# Altium PCB PCB REGULATOR.PcbDoc
Units mm, origin at the board's own origin, x right, y up, seen from the top; angles counter-clockwise.
Board outline 29 x 11 mm, 2 copper layers (Top Layer, Bottom Layer); 5 components, 3 nets, 17 pads, 5 vias.
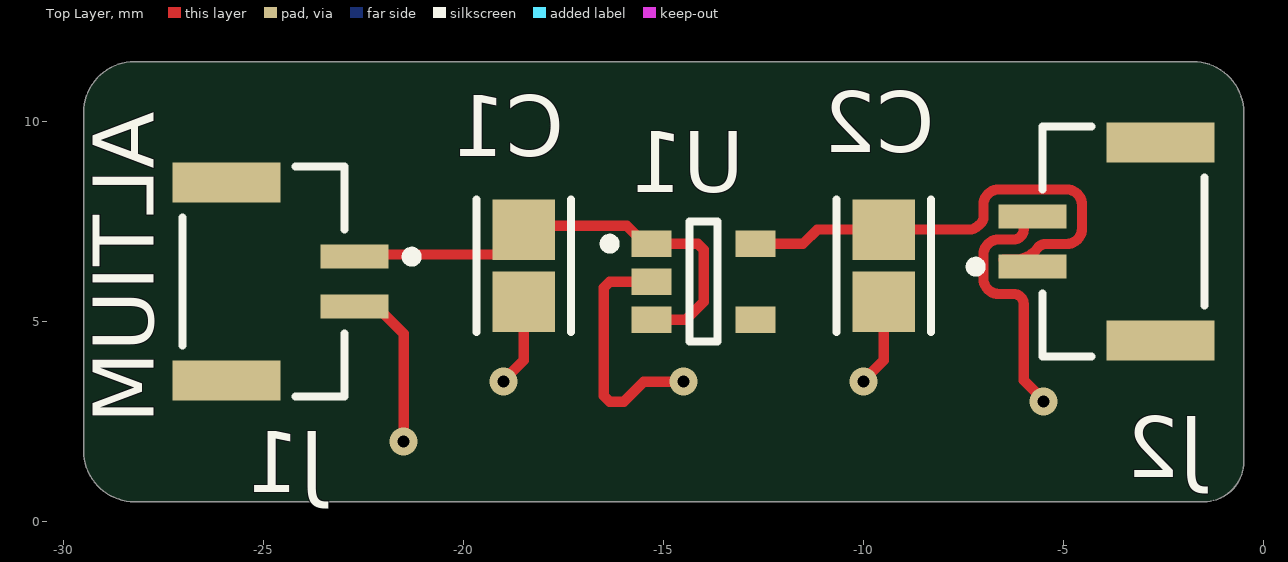
[diagram p0: Top Layer view]
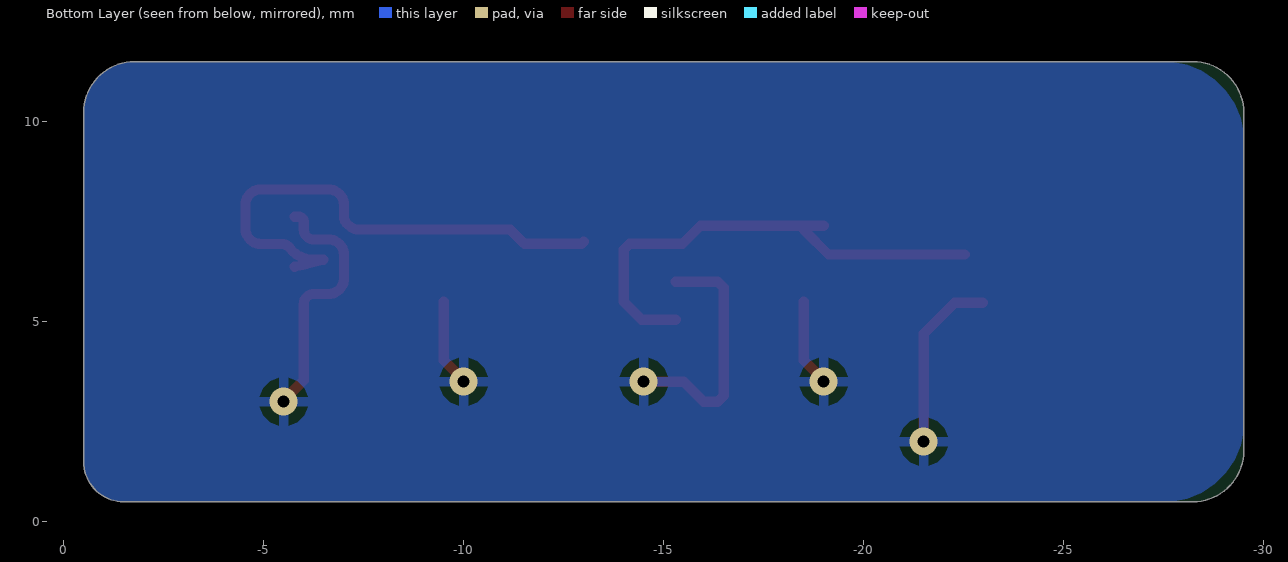
[diagram p1: Bottom Layer view, seen from below]
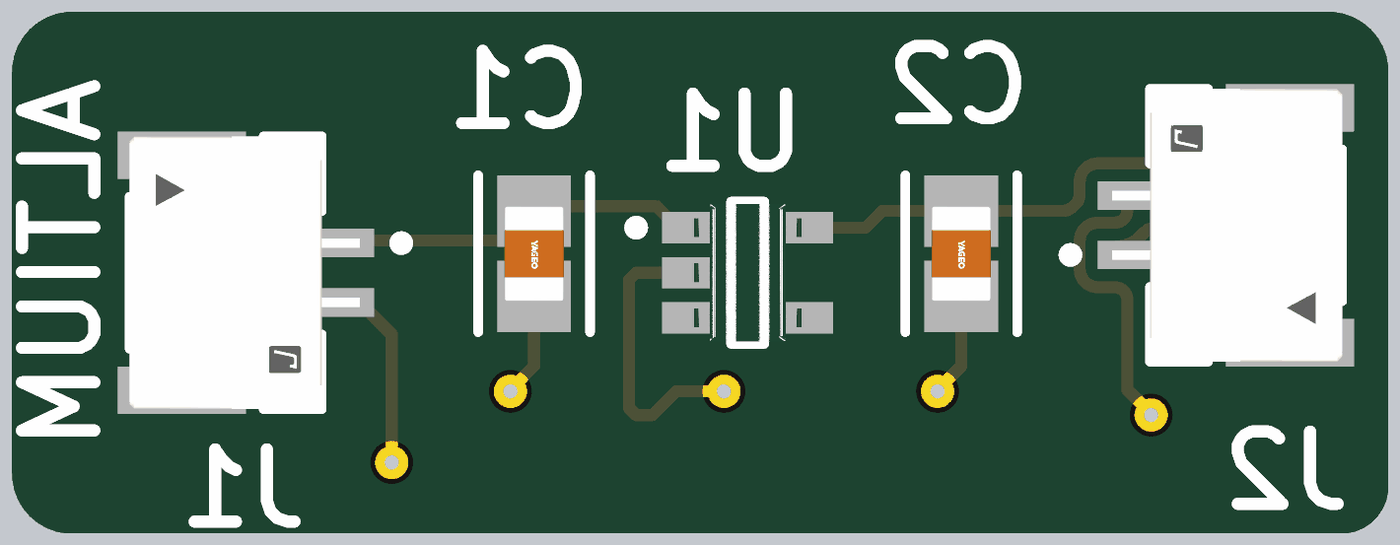
[diagram p2: 3D render of the assembled board from above, using the file's embedded part models]

## Layer stack, top to bottom
Top Solder: solder mask 0.0102, Solder Resist, Dk 3.5
Top Layer: signal copper 0.0356
Dielectric 1: dielectric 0.32, FR-4, Dk 4.8
Bottom Layer: signal copper 0.0356
Bottom Solder: solder mask 0.0102, Solder Resist, Dk 3.5

## Board outline
-29.5,1.77 ccw(c-28.23,1.77) -28.23,0.5 -1.5,0.5 ccw(c-1.5,1.5) -0.5,1.5 -0.5,10.23 ccw(c-1.77,10.23) -1.77,11.5 -28.23,11.5 ccw(c-28.23,10.23) -29.5,10.23

## Design rules (kind name [scope] priority, off if disabled: settings)
Clearance [All] p1: gap=0.254 ignorepadtopadclearanceinfootprint=FALSE except(0: Arc-Hole Track-Hole SMDPad-Hole THPad-Hole Via-Hole Fill-Hole Poly-Hole Region-Hole Text-Hole)
PolygonConnect [All] p1: connectstyle=Relief reliefconductorwidth=0.254 reliefentries=4 polygonreliefangle="90 Angle" airgapwidth=0.254
RoutingVias [All] p1: holewidth=0.711 width=1.27 viastyle="Through Hole" minholewidth=0.711 minwidth=1.27 maxholewidth=0.711 maxwidth=1.27
SolderMaskExpansion [All] p1: expansion=0.102 istentingtop=FALSE
Width [All] p1: maxlimit=0.254 minlimit=0.254 preferedwidth=0.254
30 further rules are at their usual default settings.

## Components (designator, comment, footprint, x,y, rotation, side; value= is the part's Value field where it differs from the comment)
C1 "1u" FP-CC0805-0_2-1_45-IPC_A -18.5,6.401 r270 top
C2 "1u" FP-CC0805-0_2-1_45-IPC_A -9.5,6.401 r270 top
J1 "SM02B-GHS-TB(LF)(SN)" FP-SM02B-GHS-TB_LF_SN-MFG -25,6 r270 top
J2 "SM02B-GHS-TB(LF)(SN)" FP-SM02B-GHS-TB_LF_SN-MFG -3.5,7 r90 top
U1 "MIC5317-3.3YM5-TR" FP-SOT23-5LD-PL-1-MFG -14,6 r0 top

## Footprints (in the part's own frame and the unit in brackets; to place one, negate y for a bottom-side part, rotate by r counter-clockwise, add the part's x,y. Pads: shape width x height; smd on the part's side, far side on the other; paste and mask are expansions set on the pad)
FP-CC0805-0_2-1_45-IPC_A [mm]
  rect 1.505x1.556 smd paste+0 mask+0: 1(-0.901,0) 2(0.901,0)
  silkscreen extent -1.65,-1.18 1.65,1.18, body extent -2.15,-1.28 2.15,1.28, height 0.25
FP-SM02B-GHS-TB_LF_SN-MFG [mm]
  rect 0.6x1.7 smd paste+0 mask+0: 1(-0.625,2.275) 2(0.625,2.275)
  rect 1x2.7 smd paste+0 mask+0: 3(-2.475,-0.925) 4(2.475,-0.925)
  silkscreen extent -2.88,-2.02 2.88,3.83, body extent -3.08,-2.37 3.08,3.22, height 0.25
FP-SOT23-5LD-PL-1-MFG [mm]
  rect 1x0.66 smd paste+0 mask+0: 1(-1.3,0.95) 2(-1.3,0) 3(-1.3,-0.95) 4(1.3,-0.95) 5(1.3,0.95)
  silkscreen extent -2.47,-1.5 0.35,1.5, body extent -1.9,-1.6 1.9,1.6, height 0.25

## Part data
C1 C2: library part CMP-1036-04922-3, "CAP CER 10UF 10V X5R 0805", Capacitance=10uF, Case Code (Imperial)=0805, Case Code (Metric)=2012, Dielectric=X5R, Max Operating Temperature=85°C, Min Operating Temperature=-55°C, Package Quantity=1, Resistor Type=Ceramic, Tolerance=10%, Voltage=10V, Case/Package=0805, Construction=Flat, Depth=1.25mm, Dissipation Factor=15%, Halogen Free="Halogen Free", Height=0.85mm, Lead Free="Lead Free", Length=2mm, Mount="Surface Mount", Number of Pins=2, Packaging="Tape and Reel", Radiation Hardening=No, RoHS Compliant=Yes, Series=CC, Termination=SMD/SMT, Voltage Rating=10V, Voltage Rating (DC)=10V, Width=0.049inch
J1 J2: library part CMP-2000-07076-2, "CONN HEADER SMD R/A 2POS 1.25MM", Color=Natural, Current Rating=1A, Package Quantity=2500, Voltage Rating=50V, Connector Type="Outer Shroud Contact", Contact Material=Bronze, Contact Plating=Tin, Contact Type="Male Pin", Fastening Type=Latch, Housing Color=Natural, Housing Material=Nylon, Lead Free="Lead Free", Mount="Surface Mount", Number of Contacts=2, Number of Positions=2, Number of Rows=1, Orientation="Right Angle", Packaging="Tape and Reel", Pitch=0.049inch, Series=GH, Termination=Solder
U1: library part CMP-06324-000116-1, "IC REG LINEAR 3.3V 150MA SOT23-5", Case/Package=SOT-23-5, Dropout Voltage=155mV, Max Input Voltage=6V, Max Operating Temperature=125°C, Min Current Limit=200mA, Min Input Voltage=2.5V, Min Operating Temperature=-40°C, Output Current=150mA, Output Voltage=3.3V, Package Quantity=3000, Power Supply Rejection Ratio (PSRR)=70dB, Mount="Surface Mount", Number of Outputs=1, Number of Regulators=1, Packaging="Tape and Reel", RoHS Compliant=No, Series=-

## Via types
v1: diameter 0.7, hole 0.3, Top Layer to Bottom Layer, 5 vias

## Nets (pads, with @x,y where several pads share a name; then routed paths per layer and width w, separated by ;. In a path a pad name is that pad's centre, name@x,y a point inside that pad or via, vN(x,y) a via of type N, cw(c..) or ccw(c..) an arc to the next point about the centre after c; other vN are vias at no path point)
+5: C2.1 J2.1 U1.5 | length 13.2
  Top Layer w0.254: U1.5@-13,7 -12.95,6.95 U1.5 -11.516,6.95 -11.165,7.302 C2.1 -7.353,7.302 ccw(c-7.354,7.556) -7.192,7.359 cw(c-6.625,6.675) -7.118,7.415 ccw(c-7.26,7.625) -7.006,7.624 -7.006,7.925 cw(c-6.625,7.925) -6.625,8.306 -4.925,8.306 cw(c-4.925,7.925) -4.544,7.925 -4.544,7.325 cw(c-4.925,7.325) -4.925,6.944 -5.45,6.944 ccw(c-5.449,6.69) -5.65,6.846 cw(c-6.254,7.31) -6.254,6.548 -6.498,6.548 -5.973,6.422 J2.1
GND: C1.2 C2.2 J1.2 J2.2 U1.2 | length 21.6
  Top Layer w0.254: J1.2@-22.975,5.475 -22.275,5.475 -21.5,4.7 v1(-21.5,2) ; v1(-19,3.5) -19,3.534 -18.5,4.034 C1.2 ; U1.2 -16.351,6 -16.5,5.851 -16.5,3.149 -16.351,3 -16,3 -15.5,3.5 v1(-14.5,3.5) ; v1(-10,3.5) -10,3.534 -9.5,4.034 C2.2 ; J2.2 -5.875,7.625 ccw(c-5.875,7.5) -6,7.5 -6,7.31 cw(c-6.254,7.31) -6.254,7.056 -6.625,7.056 ccw(c-6.625,6.675) -7.006,6.675 -7.006,6.075 ccw(c-6.625,6.075) -6.625,5.694 -6.254,5.694 cw(c-6.254,5.44) -6,5.44 -6,3.534 -5.5,3.034 v1(-5.5,3)
VCC: C1.1 J1.1 U1.1 U1.3 | length 12.3
  Top Layer w0.254: J1.1@-22.527,6.681 -19.121,6.681 C1.1 ; C1.1@-19,7.401 -18.5,7.401 -15.921,7.401 -15.47,6.95 U1.1 -14.149,6.95 -14,6.801 -14,5.5 -14.45,5.05 U1.3
pads on no net: J1.3 J1.4 J2.3 J2.4 U1.4

## Polygon pours and split planes (outlines as drawn)
GND on Bottom Layer "GND_L02_P001" (solid, pour order 1): -27.5,11.5 ccw(c-27.5,9.5) -29.5,9.5 -29.5,2.5 ccw(c-27.5,2.5) -27.5,0.5 -1.5,0.5 ccw(c-1.5,1.5) -0.5,1.5 -0.5,10.23 ccw(c-1.77,10.23) -1.77,11.5

## Silkscreen, mask and mechanical layers (free items; w line width, h text height)
Top Overlay:
  text "ALTIUM" at -27.754,10.246 h1.52 r90